# Altium PCB PCB_PDB_V1.PcbDoc
Units mm, origin at the board's own origin, x right, y up, seen from the top; angles counter-clockwise.
Board outline 60 x 60 mm, 4 copper layers (Top Layer, Int1 (GND), Int2 (PWR), Bottom Layer), stack 1.369 mm thick; 79 components, 36 nets, 262 pads, 2 vias.
Unrouted connection lines stored in the file: 133.
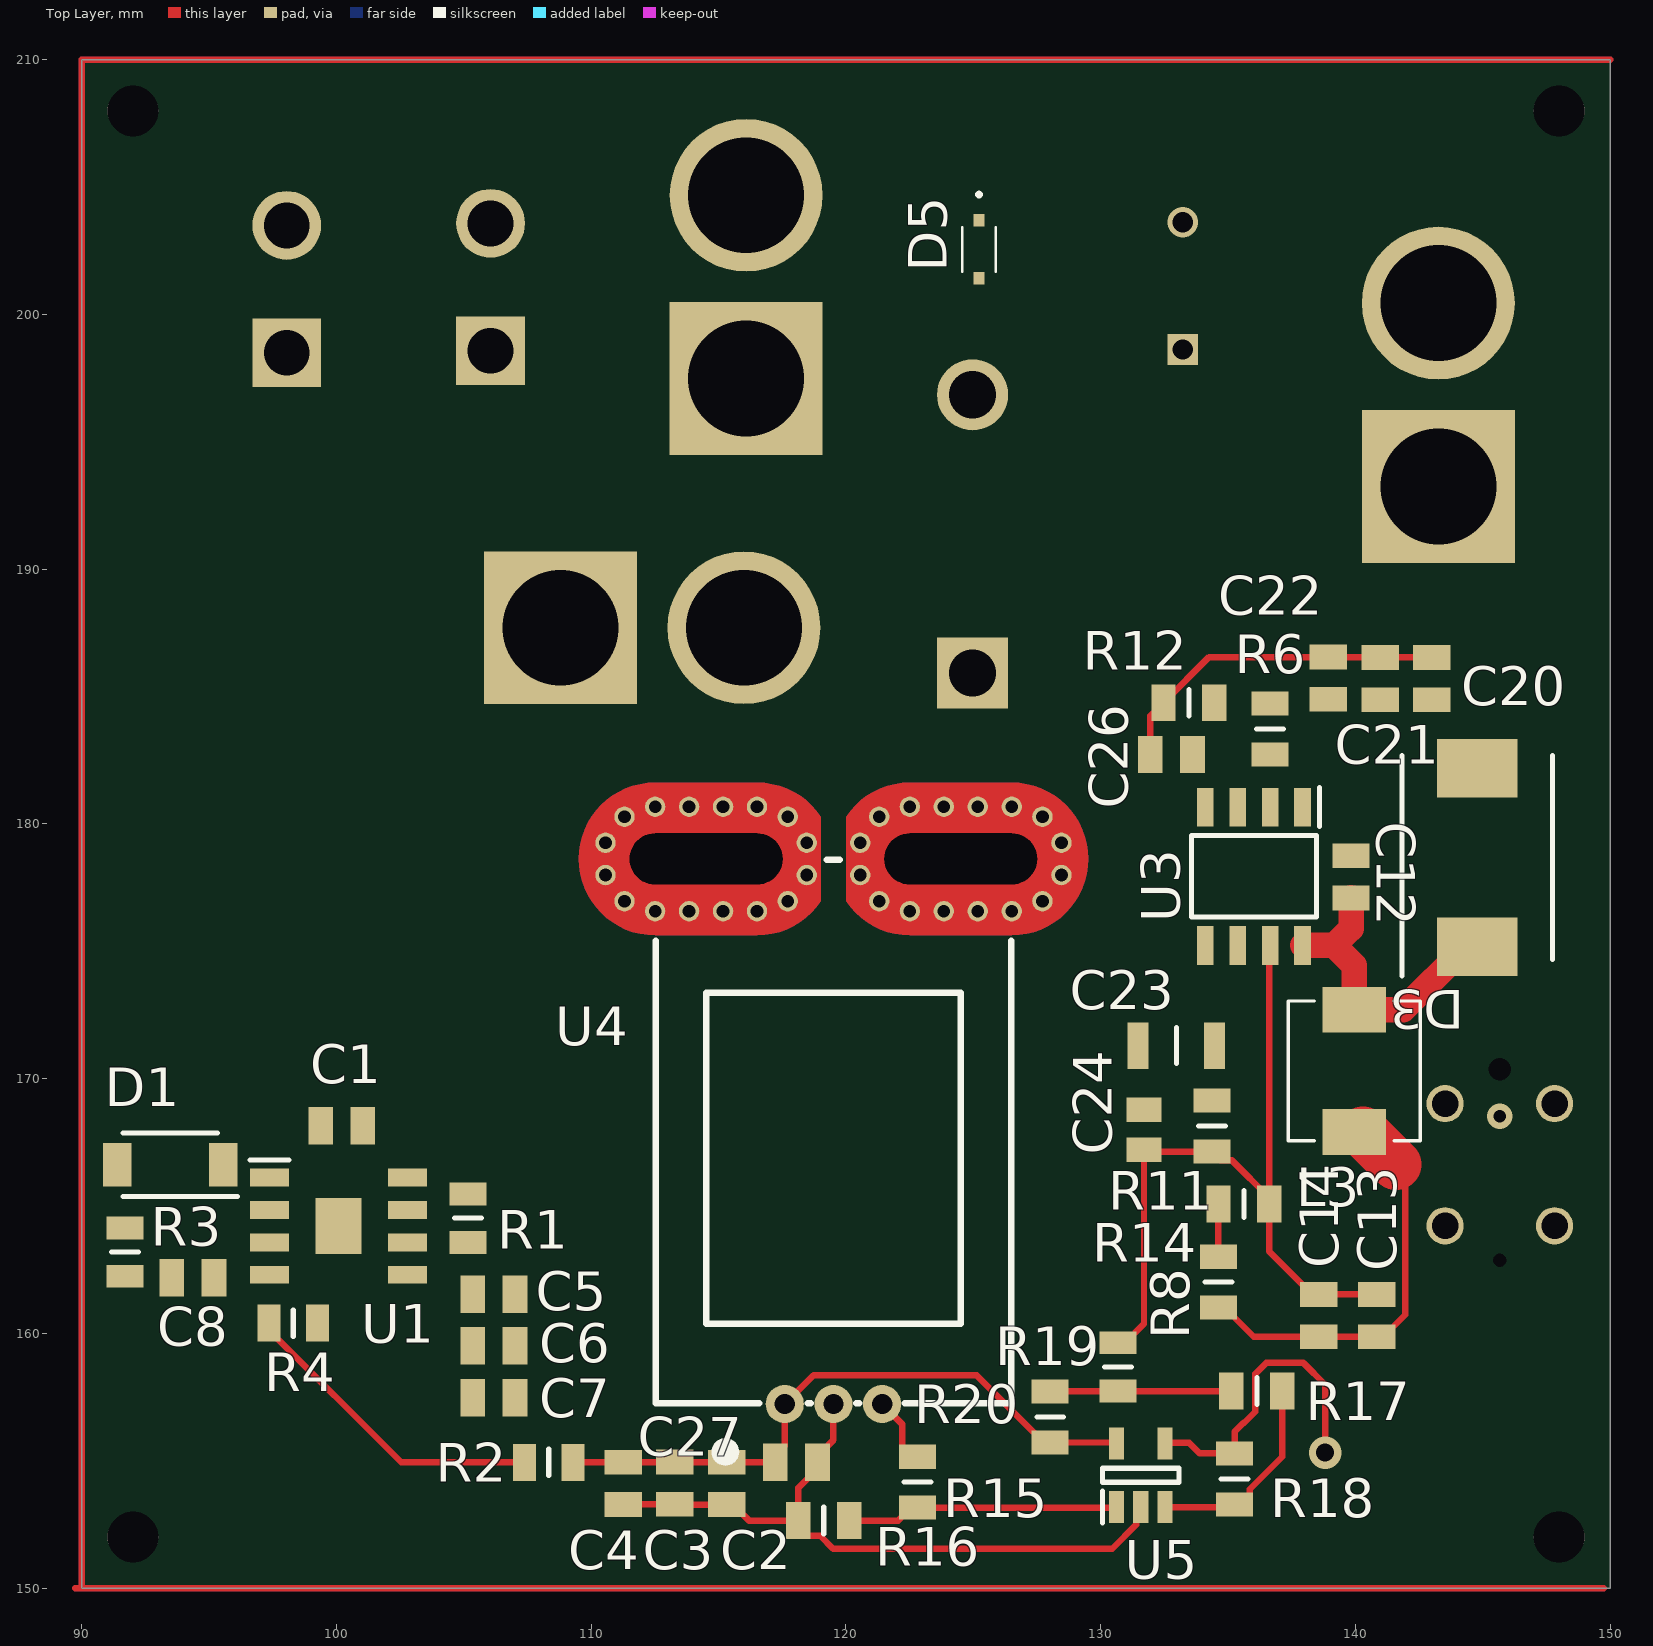
[diagram p0: Top Layer view]
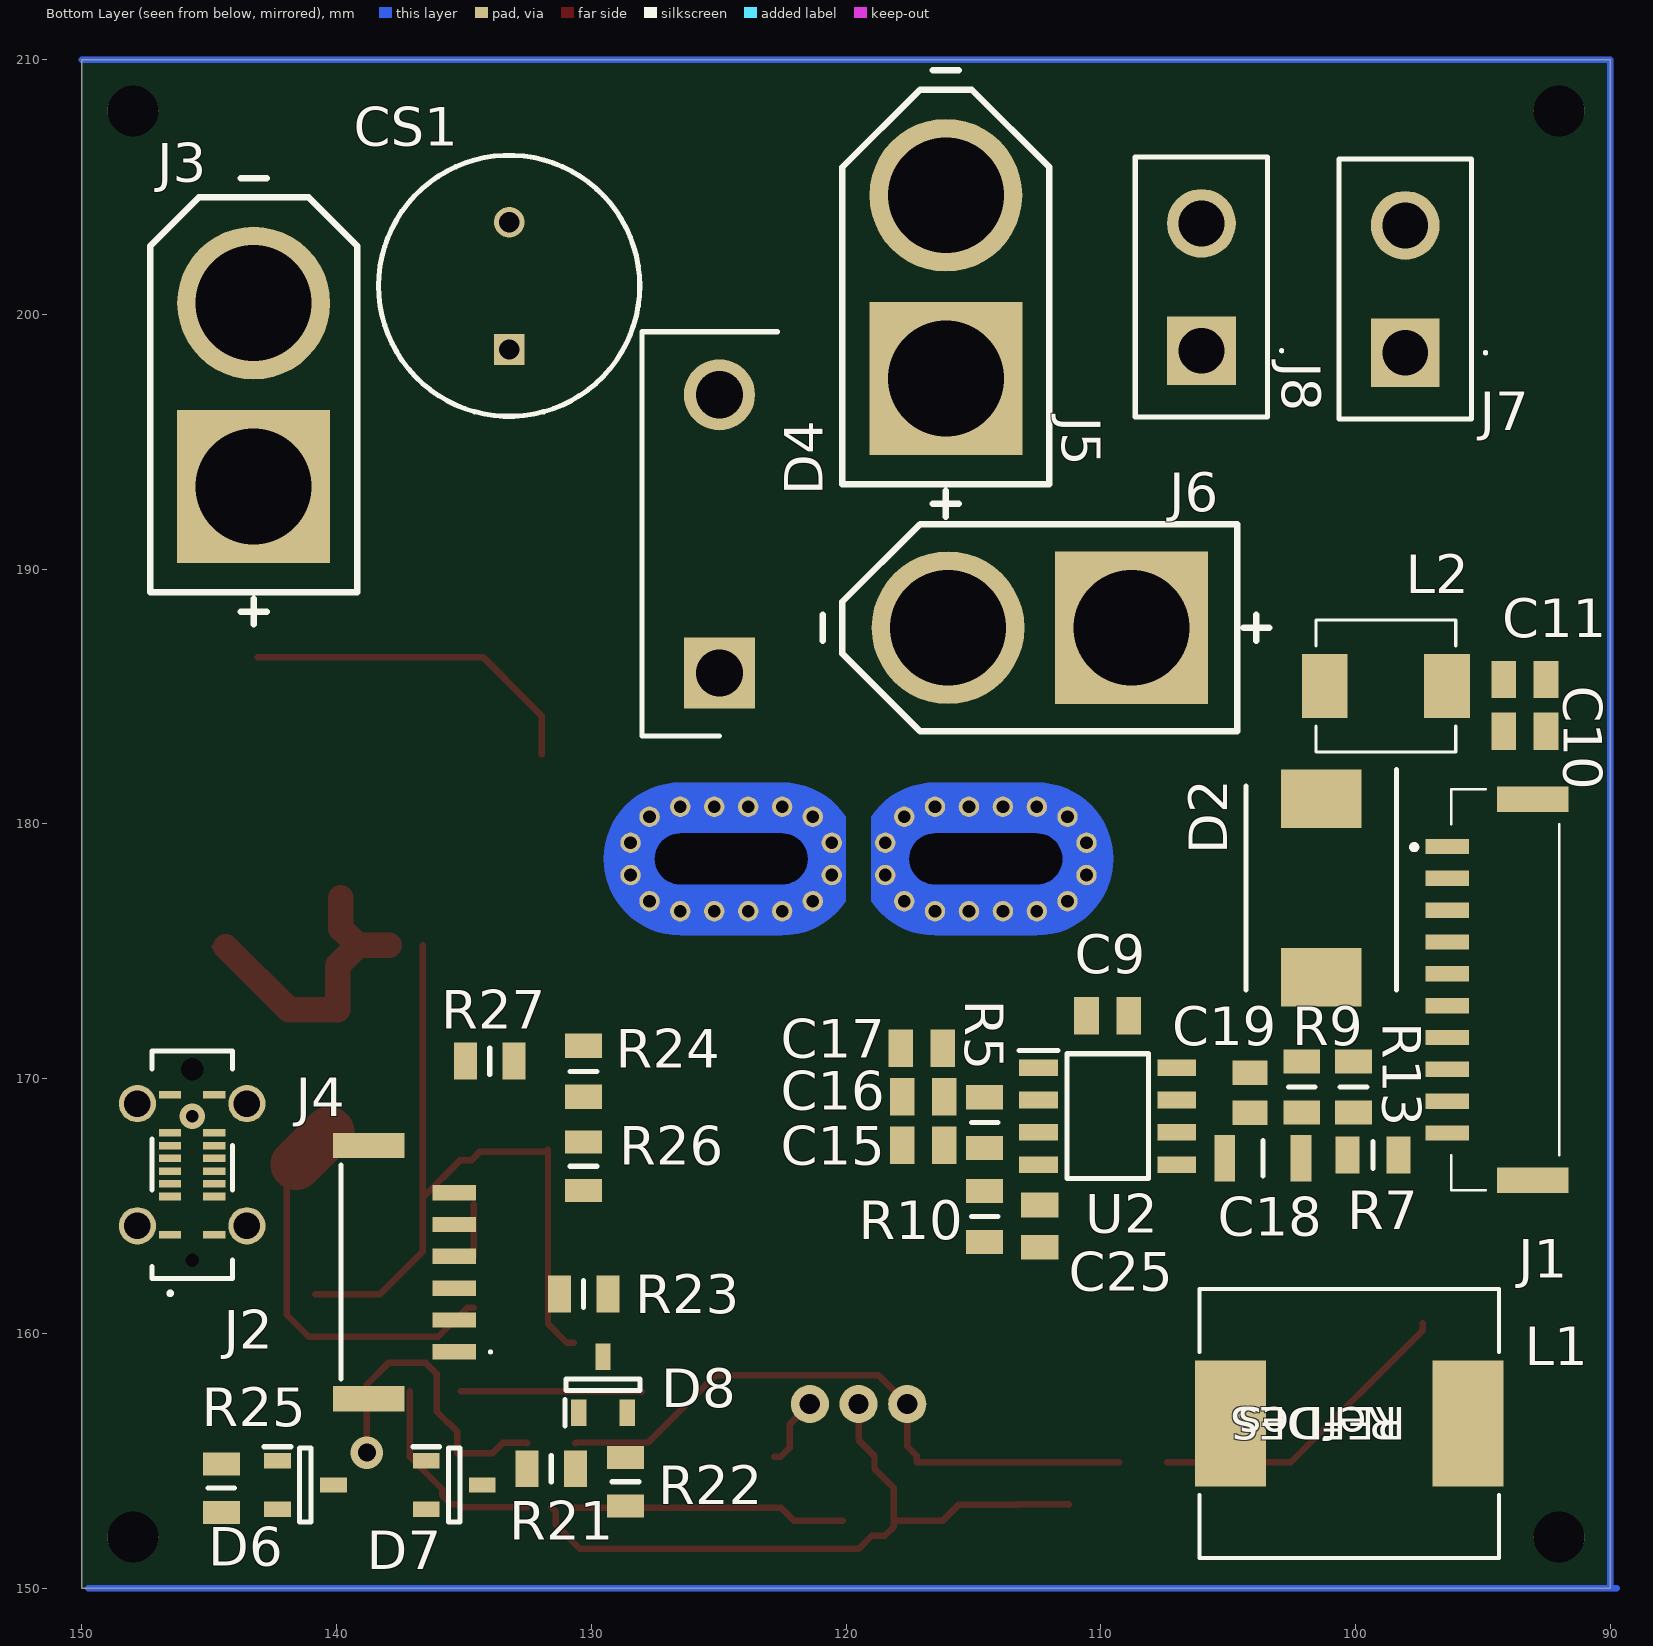
[diagram p1: Bottom Layer view, seen from below]
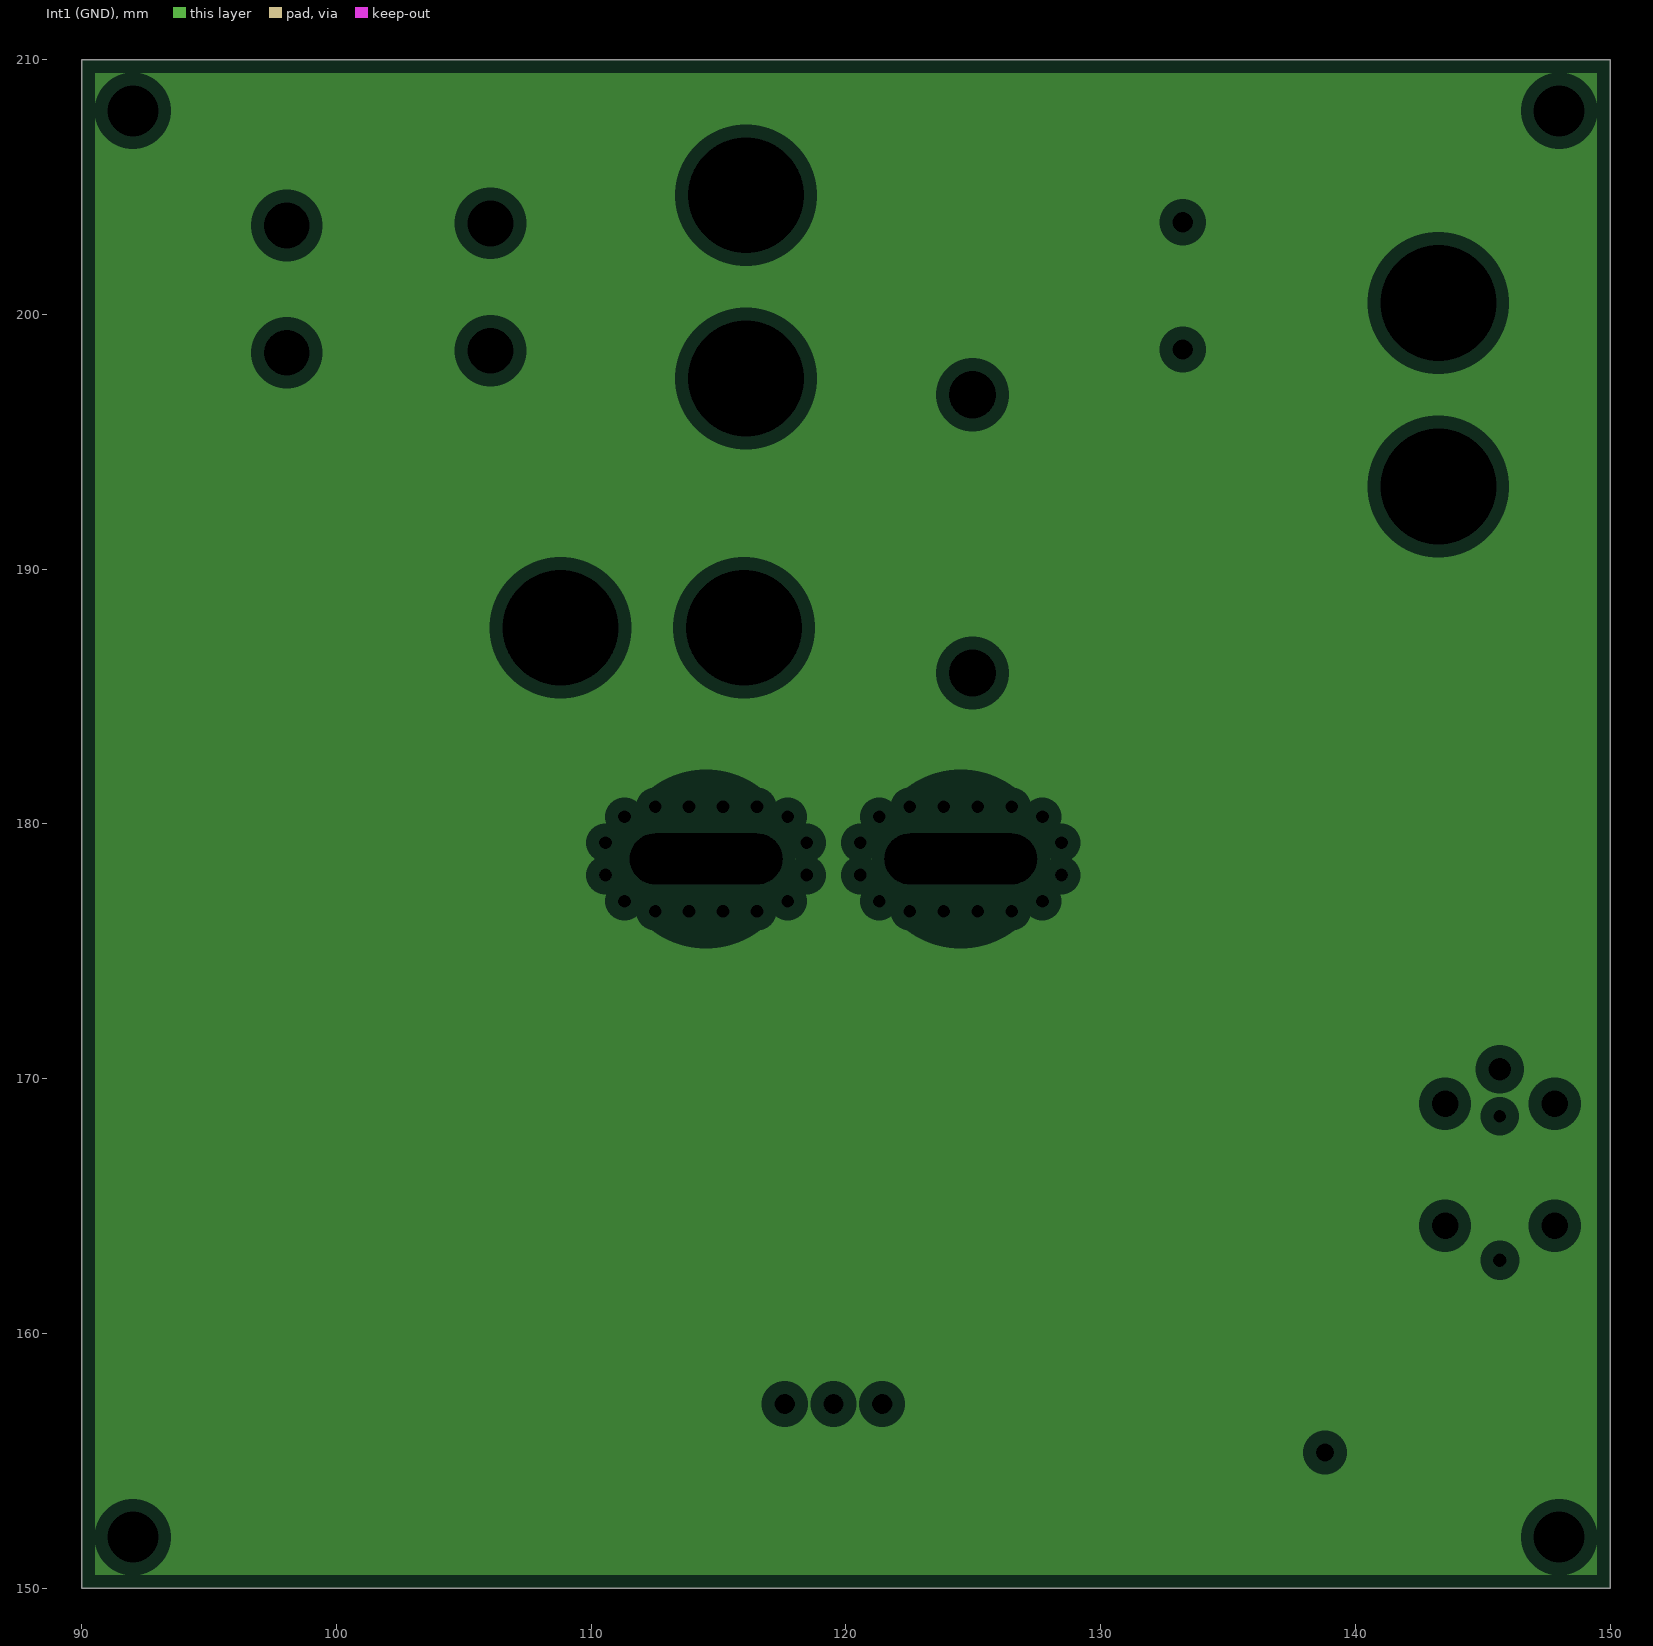
[diagram p2: Int1 (GND), clearances drawn from the general rule]
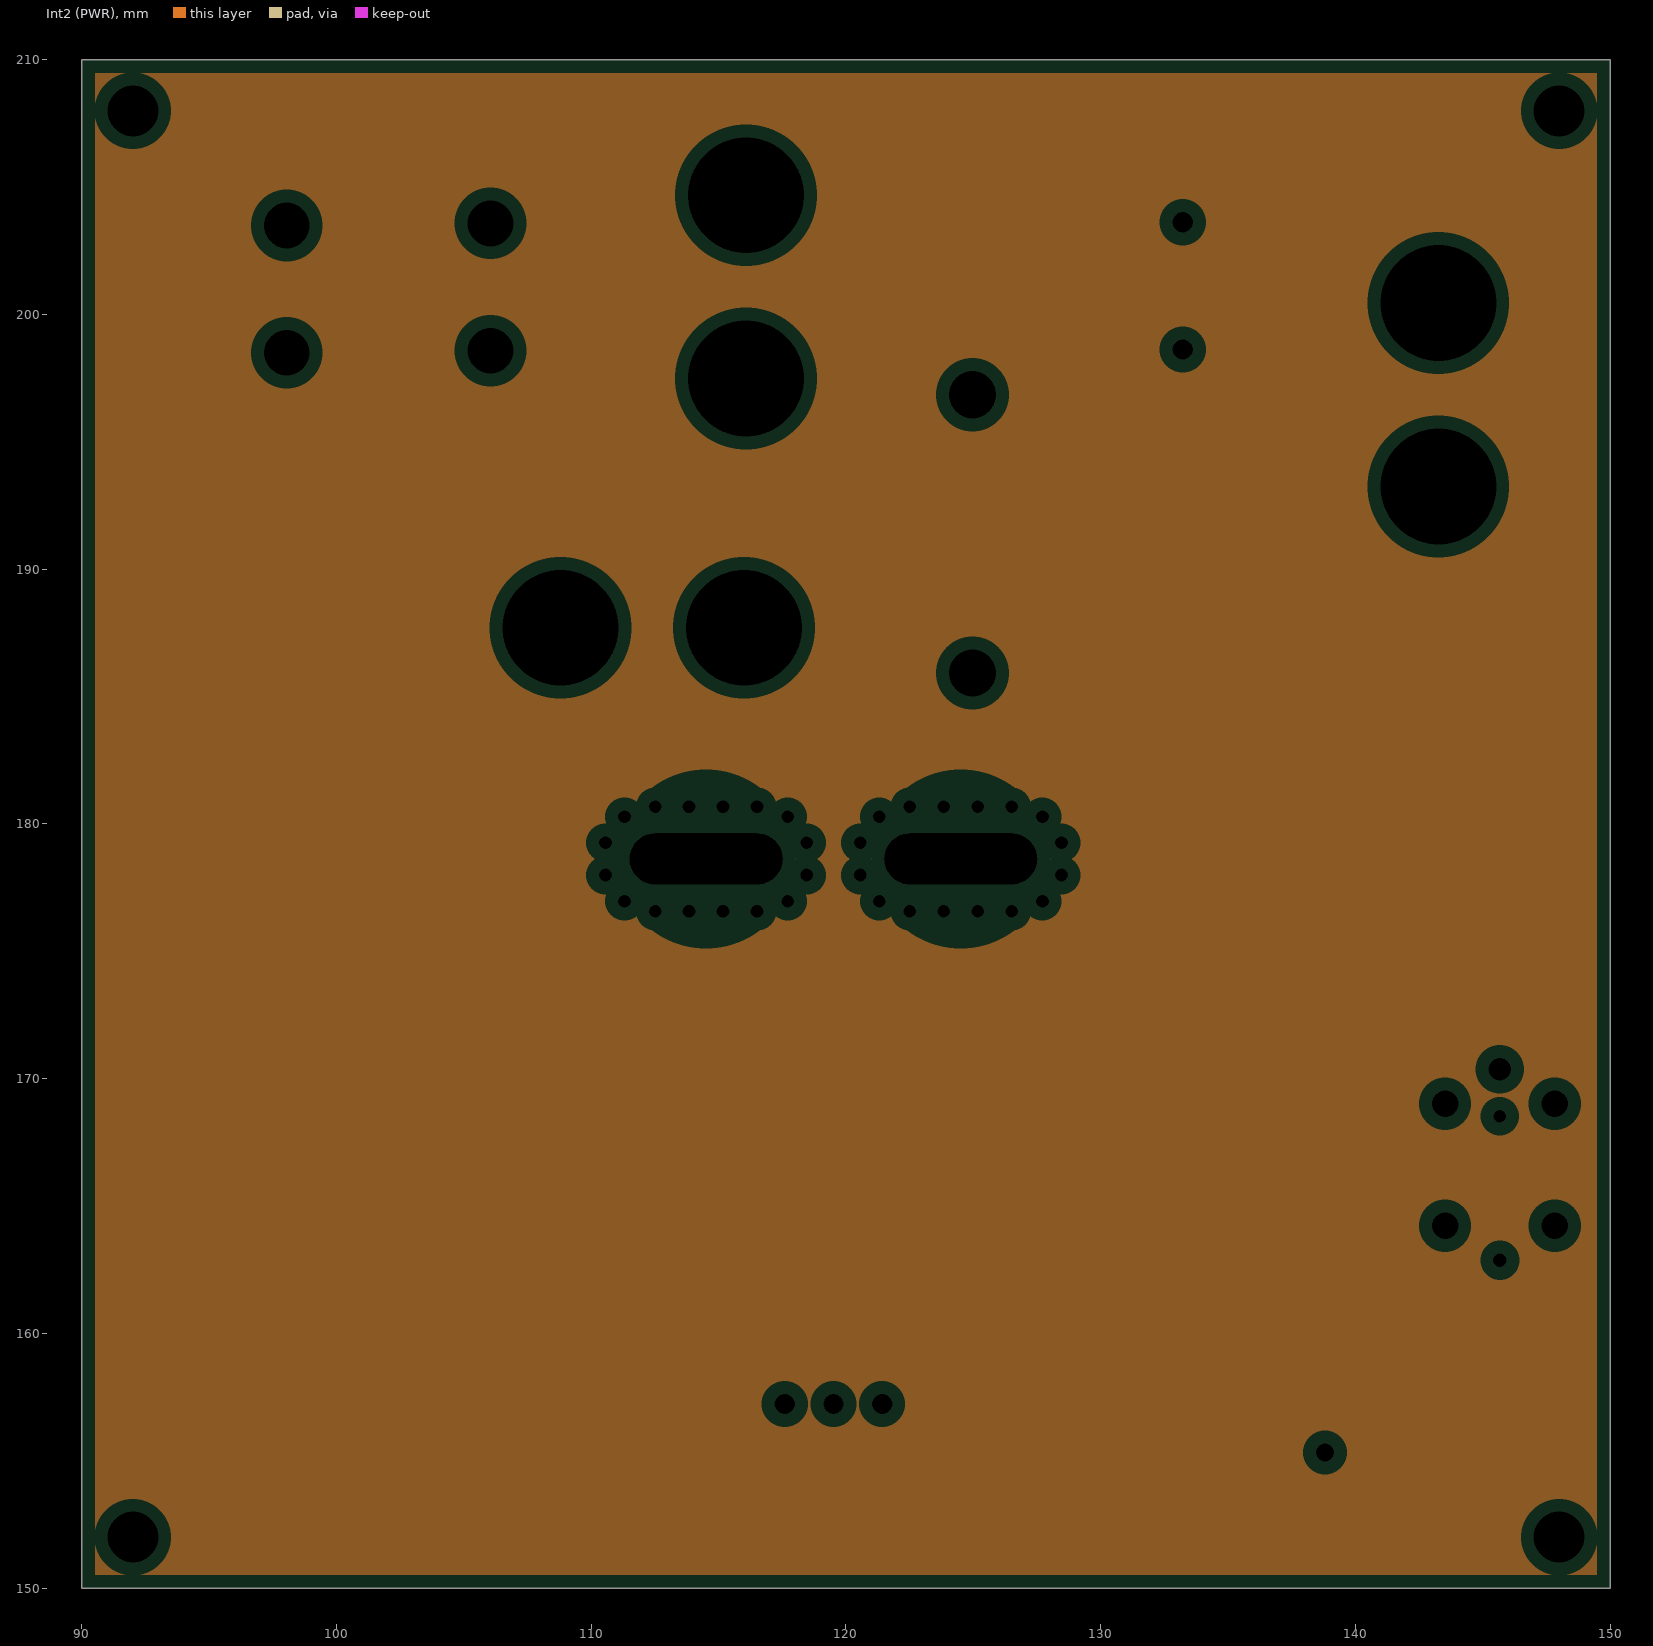
[diagram p3: Int2 (PWR), clearances drawn from the general rule]

## Layer stack, top to bottom
Top Solder: solder mask 0.0254, SM-001, Dk 4
Top Layer: signal copper 0.035
Dielectric 1: prepreg 0.1295, PP-017, Dk 4.3
Dielectric 2: prepreg 0.1295, PP-017, Dk 4.3
Int1 (GND): plane copper 0.035
Dielectric 3: core 0.7112, Core-039, Dk 4.8
Int2 (PWR): plane copper 0.035
Dielectric 4: prepreg 0.1295, PP-017, Dk 4.3
Dielectric 5: prepreg 0.1295, PP-017, Dk 4.3
Bottom Layer: signal copper 0.035
Bottom Solder: solder mask 0.0254, SM-001, Dk 4

## Board outline
90,150 150,150 150,210 90,210

## Design rules (kind name [scope] priority, off if disabled: settings)
Clearance [All] p1: gap=0.254 ignorepadtopadclearanceinfootprint=FALSE
PlaneClearance [All] p1: clearance=0.508
PlaneConnect [All] p1: planeconnectstyle=Relief reliefexpansion=0.508 reliefentries=4 reliefconductorwidth=0.254 reliefairgap=0.254
PolygonConnect [All] p1: connectstyle=Relief reliefconductorwidth=0.254 reliefentries=4 polygonreliefangle="90 Angle" airgapwidth=0.254
RoutingVias [All] p1: holewidth=0.711 width=1.27 viastyle="Through Hole" minholewidth=0.711 minwidth=1.27 maxholewidth=0.711 maxwidth=1.27
SolderMaskExpansion [All] p1: expansion=0.102 istentingtop=FALSE
SupplyNets "Schematic Supply Nets_2" [InNet('GND')] p1: voltage=0.000
SupplyNets "Schematic Supply Nets_1" [InNet('+22.2V BATTERY')] p2: voltage=0.000
SupplyNets "Schematic Supply Nets" [InNet('+5V PIXHAWK')] p3: voltage=0.000
Width [All] p1 off: maxlimit=60 minlimit=0.254 preferedwidth=1 minimp=50.000000 maximp=50.000000 favimp=50.000000
28 further rules are at their usual default settings.

## Classes and differential pairs
component class PowerModul: C1 C2 C3 C4 C5 C6 C7 C8 C9 C12 C17 C22 C25 C26 C27 D1 R1 R2 R3 R4 U1

## Components (designator, comment, footprint, x,y, rotation, side; value= is the part's Value field where it differs from the comment)
C1 "0.1uF" CAPC2012X145N 100.203,168.148 r0 top
C2 "47uF 10V" CAPC2012X145N 115.316,154.11 r90 top
C3 "47uF 10V" CAPC2012X145N 113.284,154.119 r90 top
C4 "47uF 10V" CAPC2012X145N 111.252,154.11 r90 top
C5 "10uF 35V" CAPC2012X145N 106.172,161.544 r0 top
C6 "10uF 35V" CAPC2012X145N 106.172,159.512 r0 top
C7 "0.1uF" CAPC2012X145N 106.172,157.48 r0 top
C8 "10nF" CAPC2012X145N 94.361,162.179 r0 top
C9 "0.1uF" CAPC2012X145N 109.728,172.466 r180 bottom
C10 "47uF 10V" CAPC2012X145N 93.345,183.642 r0 bottom
C11 "47uF 10V" CAPC2012X145N 93.345,185.674 r0 bottom
C12 "0.1uF" CAPC2012X145N 139.827,177.927 r270 top
C13 "47uF 10V" CAPC2012X145N 140.843,160.699 r270 top
C14 "47uF 10V" CAPC2012X145N 138.557,160.699 r270 top
C15 "4.7 uF 50V" CAPC2012X145N 116.967,167.386 r180 bottom
C16 "4.7 uF 50V" CAPC2012X145N 116.967,169.291 r180 bottom
C17 "10nF" CAPC2012X145N 117.026,171.196 r180 bottom
C18 "2200pF" CAPC3216X130N 103.632,166.878 r0 bottom
C19 "22 pF 50 V" CAPC2012X70N 104.14,169.446 r270 bottom
C20 "4.7 uF 50V" CAPC2012X145N 143.002,185.709 r270 top
C21 "4.7 uF 50V" CAPC2012X145N 140.97,185.709 r270 top
C22 "10nF" CAPC2012X145N 138.938,185.725 r270 top
C23 "2200pF" CAPC3216X130N 132.969,171.299 r180 top
C24 "22 pF 50 V" CAPC2012X70N 131.699,167.997 r90 top
C25 "10nF" CAPC2012X145N 112.395,164.211 r90 bottom
C26 "10nF" CAPC2012X145N 132.774,182.729 r0 top
C27 "0.1uF" CAPC2012X145N 118.051,154.94 r180 top
CS1 "1000uF" CAPPRD500W60D1025H2150 133.223,198.628 r90 bottom
D1 "60V" SODFL4725X105N 93.472,166.624 r180 top
D2 "CDBC540-G" DIOM8059X290N 101.346,177.49 r270 bottom
D3 "CDBC540-G" DIOM8059X290N 144.78,178.689 r90 top
D4 "400V 60A" TO1092P531X1558X2499-2P 124.968,185.93 r90 bottom
D5 "SD15C-01FTG" SD15C01FTG 125.222,202.562 r270 top
D6 "BAT54S,215" SOT95P230X110-3N 141.224,154.051 r180 bottom
D7 "BAT54S,215" SOT95P230X110-3N 135.382,154.051 r180 bottom
D8 "TL431MFDT,215" SOT95P230X110-3N 129.54,157.988 r90 bottom
J1 "BM10B-GHS-TBT_LF__SN__N_" BM10BGHSTBTLFSNN 96.393,173.492 r90 bottom
J2 "USB4120-03-C" USB412003C 145.669,166.624 r90 bottom
J3 "XT60PB-M" XT60PB-M 143.256,196.85 r180 bottom
J4 "BM06B-GHS-TBT_LF__SN_" BM06BGHSTBTLFSN 137.607,162.403 r270 bottom
J5 "XT60PB-F" XT60PB-F 116.078,201.085 r180 bottom
J6 "XT60PB-F" XT60PB-F 112.395,187.706 r90 bottom
J7 "XT30UPB-F" XT30UPBF 98.044,198.501 r180 bottom
J8 "XT30UPB-F" XT30UPBF 106.045,198.581 r180 bottom
L1 "22 uH" IND_104CDMCCDS_SUM 100.244,156.464 r0 bottom
L2 "4.7uH" IND_ECS-MPIL0530-4R7MC 98.806,185.42 r180 bottom
L3 "4.7uH" IND_ECS-MPIL0530-4R7MC 139.954,170.307 r270 top
R1 "10k" RESC2012X60N 105.156,164.526 r90 top
R2 "160k" RESC2012X60N 108.331,154.94 r0 top
R3 "4.7k" RESC2012X60N 91.694,163.195 r270 top
R4 "30k" RESC2012X60N 98.298,160.401 r180 top
R5 "665k" RESC2012X50N 114.554,168.275 r90 bottom
R6 "665k" RESC2012X50N 136.652,183.729 r270 top
R7 "10.2k" RESC2012X50N 99.314,167.005 r180 bottom
R8 "10.2k" RESC2012X50N 134.62,162.012 r270 top
R9 "37.4k" RESC2012X50N 102.108,169.672 r270 bottom
R10 "130k" RESC2012X50N 114.554,164.592 r90 bottom
R11 "37.4k" RESC2012X50N 134.366,168.14 r90 top
R12 "130k" RESC2012X50N 133.461,184.761 r0 top
R13 "1.96k" RESC2012X50N 100.076,169.672 r270 bottom
R14 "1.96k" RESC2012X50N 135.62,165.076 r180 top
R15 "20k" RESC2012X50N 122.809,154.162 r90 top
R16 "20k" RESC2012X50N 119.126,152.654 r0 top
R17 "20k" RESC2012X50N 136.128,157.734 r0 top
R18 "20k" RESC2012X50N 135.255,154.289 r270 top
R19 "2k" RESC2012X60N 130.683,158.684 r270 top
R20 "18k" RESC2012X50N 128.016,156.718 r270 top
R21 "806" RESC2012X60N 131.572,154.686 r180 bottom
R22 "750" RESC2012X60N 128.651,154.178 r270 bottom
R23 "2.49k" RESC2012X60N 130.302,161.544 r0 bottom
R24 "20k" RESC2012X50N 130.302,170.291 r270 bottom
R25 "100" RESC2012X60N 144.526,153.924 r90 bottom
R26 "1.6K" RESC2012X60N 130.302,166.563 r90 bottom
R27 "100" RESC2012X60N 133.985,170.688 r0 bottom
U1 "BD9G401EFJ-ME2" SOIC127P600X100-9N 100.076,164.211 r0 top
U2 "TPS54531DDAR" SOIC127P600X175-8N 109.728,168.529 r180 bottom
U3 "TPS54531DDAR" SOIC127P600X175-8N 136.017,177.948 r270 top
U4 "Current sensor" ACS770xCB-PFF 119.507,166.878 r0 top
U5 "LM321SN3T1G" SOT95P275X110-5N 131.572,154.432 r90 top

## Footprints (in the part's own frame and the unit in brackets; to place one, negate y for a bottom-side part, rotate by r counter-clockwise, add the part's x,y. Pads: shape width x height; smd on the part's side, far side on the other; paste and mask are expansions set on the pad)
ACS770xCB-PFF [mm] "Current sensor"
  round 1.5 hole 0.8: 1(-1.91,-9.65) 2(0,-9.65) 3(1.91,-9.65)
  round 1.524 hole 2 slot 6 at 0 deg: 4(5,11.75) 5(-5,11.75)
  round 0.025 smd: 4(5.25,11.75) 5(-5.25,11.75)
  round 0.025 smd far side: 4(5.25,11.75) 5(-5.25,11.75)
  round 0.8 hole 0.5: NC(-8.95,11.117) NC(-8.95,12.383) NC(-8.205,10.092) NC(-8.205,13.408) NC(-7,9.7) NC(-7,13.8) NC(-5.667,9.7) NC(-5.667,13.8) NC(-4.333,9.7) NC(-4.333,13.8) NC(-3,9.7) NC(-3,13.8) NC(-1.795,13.408) NC(-1.795,10.092) NC(-1.05,12.383) NC(-1.05,11.117) NC(1.05,11.117) NC(1.05,12.383) NC(1.795,10.092) NC(1.795,13.408) NC(3,9.7) NC(3,13.8) NC(4.333,9.7) NC(4.333,13.8) NC(5.667,9.7) NC(5.667,13.8) NC(7,9.7) NC(7,13.8) NC(8.205,13.408) NC(8.205,10.092) NC(8.95,12.383) NC(8.95,11.117)
  Top Layer region: 7,14.75 3,14.75 1.581,14.393 0.5,13.408 0.5,13.408 0.5,10.092 1.581,9.107 3,8.75 3,8.75 7,8.75 8.302,9.047 9.345,9.88 9.925,11.082 9.925,12.418 9.345,13.62 8.302,14.453 7,14.75
  Top Layer region: -7,8.75 -3,8.75 -1.581,9.107 -0.5,10.092 -0.5,10.092 -0.5,13.408 -1.581,14.393 -3,14.75 -3,14.75 -7,14.75 -8.302,14.453 -9.345,13.62 -9.925,12.418 -9.925,11.082 -9.345,9.88 -8.302,9.047 -7,8.75
  Bottom Layer region: 7,14.75 3,14.75 1.581,14.393 0.5,13.408 0.5,13.408 0.5,10.092 1.581,9.107 3,8.75 3,8.75 7,8.75 8.302,9.047 9.345,9.88 9.925,11.082 9.925,12.418 9.345,13.62 8.302,14.453 7,14.75
  Bottom Layer region: -7,8.75 -3,8.75 -1.581,9.107 -0.5,10.092 -0.5,10.092 -0.5,13.408 -1.581,14.393 -3,14.75 -3,14.75 -7,14.75 -8.302,14.453 -9.345,13.62 -9.925,12.418 -9.925,11.082 -9.345,9.88 -8.302,9.047 -7,8.75
  silkscreen extent -6.98,-12.06 6.98,11.72, body extent -7,-10.1 7,12.5, height 8
BM06BGHSTBTLFSN [mm]
  rect 0.6x1.7 smd: 1(3.125,2.225) 2(1.875,2.225) 3(0.625,2.225) 4(-0.625,2.225) 5(-1.875,2.225) 6(-3.125,2.225)
  rect 1x2.8 smd: MP1(4.975,-1.125) MP2(-4.975,-1.125)
  silkscreen extent -4.2,-2.22 4.2,3.7, body extent -5.37,-2.24 5.38,2.71, height 4.21
BM10BGHSTBTLFSNN [mm]
  rect 0.6x1.7 smd: 1(5.625,0) 2(4.375,0) 3(3.125,0) 4(1.875,0) 5(0.625,0) 6(-0.625,0) 7(-1.875,0) 8(-3.125,0) 9(-4.375,0) 10(-5.625,0)
  rect 1x2.8 smd: MP1(-7.475,-3.35) MP2(7.475,-3.35)
  silkscreen extent -7.88,-4.4 7.88,1.4, body extent -7.88,-4.54 7.88,0.41, height 4.05
CAPC2012X70N [mm]
  rect 0.96x1.39 smd: 1(-0.79,0) 2(0.79,0)
  body extent -1,-0.63 1,0.63, height 0.7
CAPC2012X145N [mm]
  rect 0.97x1.47 smd: 1(-0.83,0) 2(0.83,0)
  body extent -1,-0.63 1,0.63, height 1.45
CAPC3216X130N [mm]
  rect 0.82x1.82 smd: 1(-1.5,0) 2(1.5,0)
  silkscreen extent 0,-0.7 0,0.7, body extent -1.6,-0.8 1.6,0.8, height 1.3
CAPPRD500W60D1025H2150 [mm]
  rect 1.2x1.2 hole 0.8: 1(0,0)
  round 1.2 hole 0.8: 2(5,0)
  silkscreen extent -2.62,-5.13 7.62,5.13, body extent -2.75,-5.24 7.75,5.24, height 21.5
DIOM8059X290N [mm]
  rect 2.3x3.15 smd: 1(-3.5,0) 2(3.5,0)
  silkscreen extent -4.65,-2.95 4,2.95, body extent -4,-2.95 4,2.95, height 2.9
IND_104CDMCCDS_SUM [mm]
  rect 2.789x4.954 smd paste+0 mask+0: 1(-4.658,0) 2(4.658,0)
  silkscreen extent -5.88,-5.28 5.88,5.28, body extent -5.75,-5.16 5.75,5.16, height 3.99
IND_ECS-MPIL0530-4R7MC [mm]
  rect 1.8x2.5 smd: 1(-2.4,0) 2(2.4,0)
  silkscreen extent -2.75,-2.59 2.75,2.59, body extent -2.75,-2.59 2.75,2.59, height 3
RESC2012X50N [mm]
  rect 0.95x1.45 smd: 1(-1,0) 2(1,0)
  silkscreen extent 0,-0.53 0,0.53, body extent -1.02,-0.63 1.02,0.63, height 0.5
RESC2012X60N [mm]
  rect 0.9x1.45 smd: 1(-0.95,0) 2(0.95,0)
  silkscreen extent 0,-0.53 0,0.53, body extent -1,-0.63 1,0.63, height 0.6
SD15C01FTG [mm]
  rect 0.49x0.45 smd: 1(-1.14,0) 2(1.14,0)
  silkscreen extent -2.2,-0.65 0.87,0.65, body extent -1.31,-0.65 1.31,0.65, height 1
SODFL4725X105N [mm]
  rect 1.12x1.72 smd: 1(-2.075,0) 2(2.075,0)
  silkscreen extent -2.64,-1.25 1.85,1.25, body extent -2.35,-1.25 2.35,1.25, height 0.95
SOIC127P600X100-9N [mm]
  rect 1.525x0.7 smd: 1(-2.712,1.905) 2(-2.712,0.635) 3(-2.712,-0.635) 4(-2.712,-1.905) 5(2.712,-1.905) 6(2.712,-0.635) 7(2.712,0.635) 8(2.712,1.905)
  rect 1.8x2.2 smd: 9(0,0)
  silkscreen extent -3.47,2.61 -1.95,2.61, body extent -3,-2.45 3,2.45, height 1
SOIC127P600X175-8N [mm]
  rect 1.525x0.65 smd: 1(-2.712,1.905) 2(-2.712,0.635) 3(-2.712,-0.635) 4(-2.712,-1.905) 5(2.712,-1.905) 6(2.712,-0.635) 7(2.712,0.635) 8(2.712,1.905)
  silkscreen extent -3.47,-2.45 1.6,2.58, body extent -3,-2.45 3,2.45, height 1.75
SOT95P230X110-3N [mm]
  rect 1.05x0.6 smd: 1(-1.1,0.95) 2(-1.1,-0.95) 3(1.1,0)
  silkscreen extent -1.63,-1.45 0.23,1.5, body extent -1.2,-1.45 1.2,1.45, height 0.95
SOT95P275X110-5N [mm]
  rect 1.25x0.6 smd: 1(-1.25,0.95) 2(-1.25,0) 3(-1.25,-0.95) 4(1.25,-0.95) 5(1.25,0.95)
  silkscreen extent -1.88,-1.5 0.28,1.5, body extent -1.38,-1.5 1.38,1.5, height 1.1
TO1092P531X1558X2499-2P [mm]
  rect 2.79x2.79 hole 1.86: 1(0,0)
  round 2.79 hole 1.86: 2(10.92,0)
  silkscreen extent -2.47,-2.27 13.39,3.04, body extent -2.39,-2.21 13.31,2.81, height 25.05
USB412003C [mm]
  rect 0.3x0.87 smd: A1(-2.75,0.865) A4(-1.25,0.865) A5(-0.75,0.865) A6(-0.25,0.865) A7(0.25,0.865) A8(0.75,0.865) A9(1.25,0.865) A12(2.75,0.865) B1(2.75,-0.865) B4(1.25,-0.865) B5(0.75,-0.865) B6(0.25,-0.865) B7(-0.25,-0.865) B8(-0.75,-0.865) B9(-1.25,-0.865) B12(-2.75,-0.865)
  round 1.46 hole 1.04: MH1(-2.4,2.15) MH2(2.4,2.15) MH3(2.4,-2.15) MH4(-2.4,-2.15)
  round 0.26 hole 0.52 unplated: MH5(-3.75,0)
  round 0.445 hole 0.89 unplated: MH6(3.75,0)
  silkscreen extent -5.1,-1.58 4.47,1.58, body extent -4.47,-2.3 4.47,2.3, height 6.5
XT30UPBF [mm]
  rect 2.7x2.7 hole 1.8: 1(0,0)
  round 2.7 hole 1.8: 2(0,5)
  silkscreen extent -2.6,-2.6 3.2,7.6, body extent -2.81,-2.6 2.81,7.6, height 9.41
XT60PB-F [mm] "Connector"
  round 6 hole 4.55: N(0,3.6)
  rect 6x6 / inner round 6 / far side rect 6x6 hole 4.55: P(0,-3.6)
  silkscreen extent -4.06,-9.02 4.06,8.51, body extent -3.9,-7.8 4,7.7, height 16.69
XT60PB-M [mm] "Connector"
  round 6 hole 4.55: N(0,3.6)
  rect 6x6 / inner round 6 / far side rect 6x6 hole 4.55: P(0,-3.6)
  silkscreen extent -4.06,-9.02 4.06,8.51, body extent -4,-7.7 4,7.7, height 15.9

## Part data
C1 C7 C9 C12 C27: library part C2012X7R2A104K125AA, "Capacitor", Manufacturer_Name=TDK, Mouser Part Number=810-C2012X7R2A104K, Arrow Part Number=C2012X7R2A104K125AA, Arrow Price/Stock=https://www.arrow.com/en/products/c2012x7r2a104k125aa/tdk?region=europe, ClassName=PowerModul, Datasheet Link=https://product.tdk.com/info/en/catalog/datasheets/mlcc_commercial_midvoltage_en.pdf, Height=1.45mm, Manufacturer_Part_Number=C2012X7R2A104K125AA, Mouser Price/Stock=https://www.mouser.co.uk/ProductDetail/TDK/C2012X7R2A104K125AA?qs=NRhsANhppD9J0ZsT2%2Fo%2F7Q%3D%3D
C2 C3 C4 C10 C11 C13 C14: library part C2012X5R1A476M125AC, "Capacitor", Manufacturer_Name=TDK, Mouser Part Number=810-C2012X5R1A476M, Arrow Part Number=C2012X5R1A476M125AC, Arrow Price/Stock=https://www.arrow.com/en/products/c2012x5r1a476m125ac/tdk?region=nac, ClassName=PowerModul, Datasheet Link=https://product.tdk.com/info/en/catalog/datasheets/mlcc_commercial_midvoltage_en.pdf, Height=1.45mm, Manufacturer_Part_Number=C2012X5R1A476M125AC, Mouser Price/Stock=https://www.mouser.co.uk/ProductDetail/TDK/C2012X5R1A476M125AC?qs=LcTL%2F5vFEzGyFw5hxP%2FMXw%3D%3D
C5 C6: library part C2012X5R1V106K125AC, "Capacitor", Manufacturer_Name=TDK, Mouser Part Number=810-C2012X5R1V106K1C, Arrow Part Number=C2012X5R1V106K125AC, Arrow Price/Stock=https://www.arrow.com/en/products/c2012x5r1v106k125ac/tdk?region=europe, ClassName=PowerModul, Datasheet Link=https://product.tdk.com/info/en/catalog/datasheets/mlcc_commercial_midvoltage_en.pdf, Height=1.45mm, Manufacturer_Part_Number=C2012X5R1V106K125AC, Mouser Price/Stock=https://www.mouser.co.uk/ProductDetail/TDK/C2012X5R1V106K125AC?qs=6JAMGB%252BEdkwcwonKbQLeCg%3D%3D
C8 C17 C22 C25 C26: library part C2012X7R2E103K125AA, "Capacitor", Manufacturer_Name=TDK, Mouser Part Number=810-C2012X7R2E103K, Arrow Part Number=C2012X7R2E103K125AA, Arrow Price/Stock=https://www.arrow.com/en/products/c2012x7r2e103k125aa/tdk?region=nac, ClassName=PowerModul, Datasheet Link=https://product.tdk.com/info/en/catalog/datasheets/mlcc_commercial_midvoltage_en.pdf, Height=1.45mm, Manufacturer_Part_Number=C2012X7R2E103K125AA, Mouser Price/Stock=https://www.mouser.co.uk/ProductDetail/TDK/C2012X7R2E103K125AA?qs=NRhsANhppD%2FvPjIeAxskbg%3D%3D
C15 C16 C20 C21: library part GRM21BR61H475KE51L, "Capacitor", Manufacturer_Name="Murata Electronics", Mouser Part Number=81-GRM21BR61H475KE1L, Arrow Part Number=GRM21BR61H475KE51L, Arrow Price/Stock=https://www.arrow.com/en/products/grm21br61h475ke51l/murata-manufacturing?region=nac, Datasheet Link=https://search.murata.co.jp/Ceramy/image/img/A01X/G101/ENG/GRM21BR61H475KE51-01A.pdf, Height=1.45mm, Manufacturer_Part_Number=GRM21BR61H475KE51L, Mouser Price/Stock=https://www.mouser.co.uk/ProductDetail/Murata-Electronics/GRM21BR61H475KE51L?qs=eeBpzGFlv%252B%252BOtLzDC1PY6Q%3D%3D
C18 C23: library part CGA5H4C0G2J222J115AA, "Capacitor 2200pF 630V", Manufacturer_Name=TDK, Datasheet Link=http://docs-europe.electrocomponents.com/webdocs/14e9/0900766b814e9125.pdf, Height=1.3mm, Manufacturer_Part_Number=CGA5H4C0G2J222J115AA
C19 C24: library part CC0805JRNPO9BN220, "Capacitor", Manufacturer_Name=YAGEO, Mouser Part Number=603-CC805JRNPO9BN220, Datasheet Link=https://componentsearchengine.com/Datasheets/2/CC0805JRNPO9BN220.pdf, Height=0.7mm, Manufacturer_Part_Number=CC0805JRNPO9BN220, Mouser Price/Stock=https://www.mouser.co.uk/ProductDetail/YAGEO/CC0805JRNPO9BN220?qs=vTakOoo5QyK71b5vkghGmg%3D%3D
CS1: library part 35PX1000MEFC10X20, "Capacitor Polarised", Manufacturer_Name=Rubycon, Mouser Part Number=232-35PX1000MEFC10X2, Arrow Part Number=35PX1000MEFC10X20, Arrow Price/Stock=https://www.arrow.com/en/products/35px1000mefc10x20/rubycon?region=nac, Datasheet Link=https://www.rubycon.co.jp/wp-content/uploads/catalog-aluminum/PX.pdf, Height=21.5mm, Manufacturer_Part_Number=35PX1000MEFC10X20, Mouser Price/Stock=https://www.mouser.co.uk/ProductDetail/Rubycon/35PX1000MEFC10X20?qs=T3oQrply3y86%2F1qnNfO%252BAA%3D%3D
D1: library part RBR5LAM60ATFTR, "Schottky Diode", Manufacturer_Name="ROHM Semiconductor", Mouser Part Number=755-RBR5LAM60ATFTR, ClassName=PowerModul, Datasheet Link=https://fscdn.rohm.com/en/products/databook/datasheet/discrete/diode/schottky_barrier/rbr5lam60atftr-e.pdf, Height=1.05mm, Manufacturer_Part_Number=RBR5LAM60ATFTR, Mouser Price/Stock=https://www.mouser.co.uk/ProductDetail/ROHM-Semiconductor/RBR5LAM60ATFTR?qs=4v%252BiZTmLVHGKJkO8tMW4zA%3D%3D
D2 D3: "Diode", Manufacturer_Name="Comchip Technology", Mouser Part Number=750-CDBC540-G, Arrow Part Number=CDBC540-G, Arrow Price/Stock=https://www.arrow.com/en/products/cdbc540-g/comchip-technology?utm_currency=USD&region=nac, Datasheet Link=https://eu.mouser.com/datasheet/2/80/CDBC520-HF_Thru195340._CDBC5100-HF_RevB-1480991.pdf, Height=2.9mm, Manufacturer_Part_Number=CDBC540-G, Mouser Price/Stock=https://www.mouser.co.uk/ProductDetail/Comchip-Technology/CDBC540-G?qs=tw%252BuQ%2FB6PO2ExpPYY64Vzw%3D%3D
D4: library part VS-60EPU04-N3, "Diode", Manufacturer_Name=Vishay, Datasheet Link=https://www.vishay.com/docs/94022/vs-60epu04-n3.pdf, Height=5.31mm, Manufacturer_Part_Number=VS-60EPU04-N3
D5: "TVS Diode (Bi-directional)", Manufacturer_Name=LITTELFUSE, Mouser Part Number=576-SD15C-01FTG, Arrow Part Number=SD15C-01FTG, Arrow Price/Stock=https://www.arrow.com/en/products/sd15c-01ftg/littelfuse?region=nac, Datasheet Link=https://www.arrow.com/en/products/sd15c-01ftg/littelfuse, Height=1.14mm, Manufacturer_Part_Number=SD15C-01FTG, Mouser Price/Stock=https://www.mouser.co.uk/ProductDetail/Littelfuse/SD15C-01FTG?qs=4zl93aaztU8pjSvpxpJP6g%3D%3D
D6 D7: "Schottky Diode", Manufacturer_Name=Nexperia, Mouser Part Number=771-BAT54S-T/R, Arrow Part Number=BAT54S,215, Arrow Price/Stock=https://www.arrow.com/en/products/bat54s215/nexperia?utm_currency=USD&region=europe, Datasheet Link=https://assets.nexperia.com/documents/data-sheet/BAT54S.pdf, Height=1.1mm, Manufacturer_Part_Number=BAT54S,215, Mouser Price/Stock=https://www.mouser.co.uk/ProductDetail/Nexperia/BAT54S215?qs=me8TqzrmIYVOaf3j7zH0Wg%3D%3D
D8: "Integrated Circuit", Manufacturer_Name=Nexperia, Mouser Part Number=771-TL431MFDT215, Arrow Part Number=TL431MFDT,215, Arrow Price/Stock=https://www.arrow.com/en/products/tl431mfdt215/nexperia?utm_currency=USD&region=nac, Datasheet Link=https://assets.nexperia.com/documents/data-sheet/TL431_FAM.pdf, Height=1.1mm, Manufacturer_Part_Number=TL431MFDT,215, Mouser Price/Stock=https://www.mouser.co.uk/ProductDetail/Nexperia/TL431MFDT215?qs=A1cBxND5mHKvFzVl3lBdcQ%3D%3D
J1: "Connector", Arrow Part Number=BM10B-GHS-TBT(LF)(SN)(N), Manufacturer_Name="JST (JAPAN SOLDERLESS TERMINALS)", Arrow Price/Stock=https://www.arrow.com/en/products/bm10b-ghs-tbt-lf-sn-n/jst-manufacturing?utm_currency=USD&region=europe, Datasheet Link=http://www.jst-mfg.com/product/pdf/eng/eGH.pdf, Height=4.05mm, Manufacturer_Part_Number=BM10B-GHS-TBT(LF)(SN)(N)
J2: "Connector", Manufacturer_Name="GCT (GLOBAL CONNECTOR TECHNOLOGY)", Mouser Part Number=640-USB4120-03-C, Datasheet Link=https://gct.co/connector/usb4120, Height=6.75mm, Manufacturer_Part_Number=USB4120-03-C, Mouser Price/Stock=https://www.mouser.co.uk/ProductDetail/GCT/USB4120-03-C?qs=KUoIvG%2F9IlZaAd13sVDhkQ%3D%3D
J3 J5 J6: "Connector", ComponentLink1Description=Datasheet
  J3: ComponentLink1URL=https://www.tme.com/Document/ceb306d6300f4d2860483975b79af125/XT60UPB-M.pdf
  J5 J6: ComponentLink1URL=https://www.tme.com/Document/aa7a0328674fda4109d00dc748bb5162/XT60UPB-F.pdf
J4: "Connector", Manufacturer_Name="JST (JAPAN SOLDERLESS TERMINALS)", Manufacturer_Part_Number=BM06B-GHS-TBT(LF)(SN), Mouser Part Number=306-BM06BGHSTBTLFSNN, Datasheet Link=https://datasheet.lcsc.com/szlcsc/2004111131_JST-Sales-America-BM06B-GHS-TBT-LF-SN_C495534.pdf, Height=4.05mm, Mouser Price/Stock=https://www.mouser.co.uk/ProductDetail/JST-Commercial/BM06B-GHS-TBTLFSN?qs=cdbOS8ANM9CObKjnhD04mw%3D%3D
J7 J8: "Connector", Manufacturer_Name=Amass, Datasheet Link=https://www.tme.eu/Document/81f11ca924696756331f21b972812074/XT30PB-F.pdf, Height=9.4mm, Manufacturer_Part_Number=XT30UPB-F
L1: library part 104CDMCCDS-220MC, "Bobine de 22 uH, 5 A", Manufacturer_Name=Sumida, ComponentLink1Description=Datasheet, ComponentLink1URL=https://products.sumida.com/products/pdf/104CDMCCDS.pdf, Copyright="Copyright (C) 2025 Ultra Librarian. All rights reserved.", Manufacturer_Part_Number=104CDMCCDS-220MC, Type="Fixed Inductors"
L2 L3: library part ECS-MPIL0530-4R7MC, "4.7 µH Shielded Molded Inductor 5 A 60mOhm Max Nonstandard -", Package="ECS-MPIL0530-0-2 ECS", Check_prices=https://www.snapeda.com/parts/ECS-MPIL0530-4R7MC/ECS/view-part/?ref=eda, MF="ECS Inc.", MP=ECS-MPIL0530-4R7MC, SnapEDA_Link=https://www.snapeda.com/parts/ECS-MPIL0530-4R7MC/ECS/view-part/?ref=snap
R1: library part CRCW080510K0FKEAHP, "Resistor", Manufacturer_Name=Vishay, Mouser Part Number=71-CRCW080510K0FKEAH, Arrow Part Number=CRCW080510K0FKEAHP, Arrow Price/Stock=https://www.arrow.com/en/products/crcw080510k0fkeahp/vishay?utm_currency=USD&region=europe, ClassName=PowerModul, Datasheet Link=https://componentsearchengine.com/Datasheets/1/CRCW08051R00FKEAHP.pdf, Height=0.6mm, Manufacturer_Part_Number=CRCW080510K0FKEAHP, Mouser Price/Stock=https://www.mouser.co.uk/ProductDetail/Vishay-Dale/CRCW080510K0FKEAHP?qs=FlFvgi4rxBybVOW6oiRQjA%3D%3D
R2: library part CRCW0805160KFKEAHP, "Resistor", Manufacturer_Name=Vishay, ClassName=PowerModul, Datasheet Link=https://componentsearchengine.com/Datasheets/1/CRCW08051R00FKEAHP.pdf, Height=0.6mm, Manufacturer_Part_Number=CRCW0805160KFKEAHP
R3: library part CRCW08054K70FKEAC, "Resistor", Manufacturer_Name=Vishay, Mouser Part Number=71-CRCW08054K70FKEAC, Arrow Part Number=CRCW08054K70FKEAC, Arrow Price/Stock=https://www.arrow.com/en/products/crcw08054k70fkeac/vishay?region=nac, ClassName=PowerModul, Datasheet Link=https://mouser.componentsearchengine.com/Datasheets/1/CRCW08054K70FKEAC.pdf, Height=0.6mm, Manufacturer_Part_Number=CRCW08054K70FKEAC, Mouser Price/Stock=https://www.mouser.co.uk/ProductDetail/Vishay-Dale/CRCW08054K70FKEAC?qs=E3Y5ESvWgWOQAAVugewEHA%3D%3D
R4: library part CRCW080530K0FKEAC, "Resistor", Manufacturer_Name=Vishay, Mouser Part Number=71-CRCW080530K0FKEAC, Arrow Part Number=CRCW080530K0FKEAC, Arrow Price/Stock=https://www.arrow.com/en/products/crcw080530k0fkeac/vishay?region=nac, ClassName=PowerModul, Datasheet Link=https://mouser.componentsearchengine.com/Datasheets/1/CRCW080530K0FKEAC.pdf, Height=0.6mm, Manufacturer_Part_Number=CRCW080530K0FKEAC, Mouser Price/Stock=https://www.mouser.co.uk/ProductDetail/Vishay-Dale/CRCW080530K0FKEAC?qs=E3Y5ESvWgWMYq9MgiyaMow%3D%3D
R5 R6: library part CRCW0805665KFKEA, "Resistor", Manufacturer_Name=Vishay, Datasheet Link=http://www.vishay.com/docs/20035/dcrcwe3.pdf, Height=0.5mm, Manufacturer_Part_Number=CRCW0805665KFKEA
R7 R8: library part CRCW080510K2FKEA, "Resistor", Manufacturer_Name=Vishay, Mouser Part Number=71-CRCW0805-10.2K-E3, Arrow Part Number=CRCW080510K2FKEA, Arrow Price/Stock=https://www.arrow.com/en/products/crcw080510k2fkea/vishay?region=nac, Datasheet Link=http://www.vishay.com/docs/20035/dcrcwe3.pdf, Height=0.5mm, Manufacturer_Part_Number=CRCW080510K2FKEA, Mouser Price/Stock=https://www.mouser.co.uk/ProductDetail/Vishay-Dale/CRCW080510K2FKEA?qs=LOX6nxTstibTXRK16X5NEQ%3D%3D
R9 R11: library part CRCW080537K4FKEA, "Resistor", Manufacturer_Name=Vishay, Mouser Part Number=71-CRCW0805-37.4K-E3, Datasheet Link=http://www.vishay.com/docs/20035/dcrcwe3.pdf, Height=0.5mm, Manufacturer_Part_Number=CRCW080537K4FKEA, Mouser Price/Stock=https://www.mouser.co.uk/ProductDetail/Vishay-Dale/CRCW080537K4FKEA?qs=ofC1ORbyWJfwcxfoRR0MKw%3D%3D
R10 R12: library part CRCW0805130KFKEA, "Resistor", Manufacturer_Name=Vishay, Mouser Part Number=71-CRCW0805-130K-E3, Arrow Part Number=CRCW0805130KFKEA, Arrow Price/Stock=https://www.arrow.com/en/products/crcw0805130kfkea/vishay, Datasheet Link=http://www.vishay.com/docs/20035/dcrcwe3.pdf, Height=0.5mm, Manufacturer_Part_Number=CRCW0805130KFKEA, Mouser Price/Stock=https://www.mouser.co.uk/ProductDetail/Vishay-Dale/CRCW0805130KFKEA?qs=0y7Riw94L4iHKWUxGOctIA%3D%3D
R13 R14: library part CRCW08051K96FKEA, "Resistor", Manufacturer_Name=Vishay, Mouser Part Number=71-CRCW08051K96FKEA, Arrow Part Number=CRCW08051K96FKEA, Arrow Price/Stock=https://www.arrow.com/en/products/crcw08051k96fkea/vishay?region=nac, Datasheet Link=http://www.vishay.com/docs/20035/dcrcwe3.pdf, Height=0.5mm, Manufacturer_Part_Number=CRCW08051K96FKEA, Mouser Price/Stock=https://www.mouser.co.uk/ProductDetail/Vishay-Dale/CRCW08051K96FKEA?qs=1CkV0QOCgMpA%2F6GTgXIN%2Fg%3D%3D
R15 R16 R17 R18 R24: library part CRCW080520K0FKEA, "Resistor", Manufacturer_Name=Vishay, Mouser Part Number=71-CRCW0805-20K-E3, Arrow Part Number=CRCW080520K0FKEA, Arrow Price/Stock=https://www.arrow.com/en/products/crcw080520k0fkea/vishay, Datasheet Link=http://www.vishay.com/docs/20035/dcrcwe3.pdf, Height=0.5mm, Manufacturer_Part_Number=CRCW080520K0FKEA, Mouser Price/Stock=https://www.mouser.co.uk/ProductDetail/Vishay-Dale/CRCW080520K0FKEA?qs=t6Mf8e9K%2Ful9pWSqXxFD1w%3D%3D
R19: library part CRCW08052K00FKEAC, "Resistor", Manufacturer_Name=Vishay, Mouser Part Number=71-CRCW08052K00FKEAC, Arrow Part Number=CRCW08052K00FKEAC, Arrow Price/Stock=https://www.arrow.com/en/products/crcw08052k00fkeac/vishay?utm_currency=USD&region=nac, Datasheet Link=http://www.vishay.com/docs/28773/crcwce3.pdf, Height=0.6mm, Manufacturer_Part_Number=CRCW08052K00FKEAC, Mouser Price/Stock=https://www.mouser.co.uk/ProductDetail/Vishay-Dale/CRCW08052K00FKEAC?qs=E3Y5ESvWgWP6floxGsbShA%3D%3D
R20: library part CRCW080518K0FKEAC, "Resistor", Manufacturer_Name=Vishay, Mouser Part Number=71-CRCW080518K0FKEAC, Arrow Part Number=CRCW080518K0FKEAC, Arrow Price/Stock=https://www.arrow.com/en/products/crcw080518k0fkeac/vishay?region=nac, Datasheet Link=https://www.arrow.com/en/products/crcw080518k0fkeac/vishay?region=nac, Height=0.5mm, Manufacturer_Part_Number=CRCW080518K0FKEAC, Mouser Price/Stock=https://www.mouser.co.uk/ProductDetail/Vishay-Dale/CRCW080518K0FKEAC?qs=E3Y5ESvWgWPSwNx6fNHotQ%3D%3D
R21: library part CRCW0805806RFKEAHP, "Resistor", Manufacturer_Name=Vishay, Datasheet Link=https://componentsearchengine.com/Datasheets/1/CRCW08051R00FKEAHP.pdf, Height=0.6mm, Manufacturer_Part_Number=CRCW0805806RFKEAHP
R22: library part CRCW0805750RFKEAHP, "Resistor", Manufacturer_Name=Vishay, Mouser Part Number=71-CRCW0805750RFKEAH, Arrow Part Number=CRCW0805750RFKEAHP, Arrow Price/Stock=https://www.arrow.com/en/products/crcw0805750rfkeahp/vishay?region=nac, Datasheet Link=https://componentsearchengine.com/Datasheets/1/CRCW08051R00FKEAHP.pdf, Height=0.6mm, Manufacturer_Part_Number=CRCW0805750RFKEAHP, Mouser Price/Stock=https://www.mouser.co.uk/ProductDetail/Vishay-Dale/CRCW0805750RFKEAHP?qs=40TFAHZMFvdp5ouInDDfaw%3D%3D
R23: library part CRCW08052K49FKEAC, "Resistor", Manufacturer_Name=Vishay, Mouser Part Number=71-CRCW08052K49FKEAC, Arrow Part Number=CRCW08052K49FKEAC, Arrow Price/Stock=https://www.arrow.com/en/products/crcw08052k49fkeac/vishay, Datasheet Link=https://componentsearchengine.com/Datasheets/1/CRCW08052K49FKEAC.pdf, Height=0.5mm, Manufacturer_Part_Number=CRCW08052K49FKEAC, Mouser Price/Stock=https://www.mouser.com/Search/Refine.aspx?Keyword=71-CRCW08052K49FKEAC
R25 R27: library part CRCW0805100RFKEA, "Resistor", Manufacturer_Name=Vishay, Mouser Part Number=71-CRCW0805-100-E3, Arrow Part Number=CRCW0805100RFKEA, Arrow Price/Stock=https://www.arrow.com/en/products/crcw0805100rfkea/vishay?utm_currency=USD&region=nac, Datasheet Link=http://www.vishay.com/docs/20035/dcrcwe3.pdf, Height=0.5mm, Manufacturer_Part_Number=CRCW0805100RFKEA, Mouser Price/Stock=https://www.mouser.co.uk/ProductDetail/Vishay-Dale/CRCW0805100RFKEA?qs=LOX6nxTstiYDPDKmuLyNLw%3D%3D
R26: library part CRCW08051K60FKEAC, "Resistor", Manufacturer_Name=Vishay, Mouser Part Number=71-CRCW08051K60FKEAC, Arrow Part Number=CRCW08051K60FKEAC, Arrow Price/Stock=https://www.arrow.com/en/products/crcw08051k60fkeac/vishay, Datasheet Link=https://www.arrow.com/en/products/crcw08051k60fkeac/vishay, Height=0.6mm, Manufacturer_Part_Number=CRCW08051K60FKEAC, Mouser Price/Stock=https://www.mouser.co.uk/ProductDetail/Vishay-Dale/CRCW08051K60FKEAC?qs=E3Y5ESvWgWMJaZYHQus8LQ%3D%3D
U1: "Buck converter", Manufacturer_Name="ROHM Semiconductor", Mouser Part Number=755-BD9G401EFJ-ME2, ClassName=PowerModul, Datasheet Link=https://componentsearchengine.com/Datasheets/1/BD9G401EFJ-ME2.pdf, Height=1mm, Manufacturer_Part_Number=BD9G401EFJ-ME2, Mouser Price/Stock=https://www.mouser.co.uk/ProductDetail/ROHM-Semiconductor/BD9G401EFJ-ME2?qs=HXFqYaX1Q2yXryPBxafgDg%3D%3D
U2 U3: "Power Supply", Manufacturer_Name="Texas Instruments", Mouser Part Number=595-TPS54531DDAR, Arrow Part Number=TPS54531DDAR, Arrow Price/Stock=https://www.arrow.com/en/products/tps54531ddar/texas-instruments?utm_currency=USD&region=nac, Datasheet Link=http://www.ti.com/lit/gpn/tps54531, Height=1.7mm, Manufacturer_Part_Number=TPS54531DDAR, Mouser Price/Stock=https://www.mouser.co.uk/ProductDetail/Texas-Instruments/TPS54531DDAR?qs=jA5Ki6243onykODzUePbag%3D%3D
U4: library part ACS770KCB-150U-PFF-T, "150 A , Unidirectional", ComponentLink1Description=Datasheet, ComponentLink1URL=https://www.allegromicro.com/~/media/Files/Datasheets/ACS770-Datasheet.ashx
U5: "Integrated Circuit", Manufacturer_Name=onsemi, Mouser Part Number=863-LM321SN3T1G, Arrow Part Number=LM321SN3T1G, Arrow Price/Stock=https://www.arrow.com/en/products/lm321sn3t1g/on-semiconductor?utm_currency=USD&region=nac, Datasheet Link=https://www.onsemi.com/pub/Collateral/LM321-D.PDF, Height=1.1mm, Manufacturer_Part_Number=LM321SN3T1G, Mouser Price/Stock=https://www.mouser.co.uk/ProductDetail/onsemi/LM321SN3T1G?qs=slMPpRTKD5qNVsCzBsHVZA%3D%3D

## Free pads (board coordinates)
  oval 2x1.524 hole 2 unplated: 1(92,152) 1(92,208) 1(148,152) 1(148,208)

## Via types
v1: diameter 1, hole 0.5, Top Layer to Bottom Layer, 1 vias
v2: diameter 1.27, hole 0.711, Top Layer to Bottom Layer, 1 vias

## Nets (pads, with @x,y where several pads share a name; then routed paths per layer and width w, separated by ;. In a path a pad name is that pad's centre, name@x,y a point inside that pad or via, vN(x,y) a via of type N, cw(c..) or ccw(c..) an arc to the next point about the centre after c; other vN are vias at no path point)
"+5V PIXHAWK": C2.2 C3.2 C4.2 C27.2 J4.1 J4.2 L1.2 R2.2 R20.2 R22.2 U4.1 U5.5 | length 25
  Top Layer w0.254: R2.2 C4.2 111.261,154.949 C3.2 113.293,154.94 C2.2 C27.2 117.221,155.19 117.597,155.566 U4.1 118.728,158.359 125.125,158.359 127.766,155.718 R20.2 130.586,155.718 U5.5
"+22.2V BATTERY": C1.2 C5.2 C6.2 C7.2 C15.2 C16.2 C17.2 C20.2 C21.2 C22.2 J5.P J6.P J7.1 J8.1 R1.2 R5.2 R6.2 R24.1 U1.7 U1.8 U2.2 U3.2 U4.5
GND: C2.1 C3.1 C4.1 C5.1 C6.1 C7.1 C10.1 C11.1 C13.1 C14.1 C15.1 C16.1 C17.1 C19.1 C20.1 C21.1 C22.1 C24.1 C25.1 C26.1 C27.1 CS1.2 D1.2 D2.2 D3.2 D5.1 D8.3 J1.1 J1.2 J1.3 J1.4 J1.5 J1.6 J2.A1 J2.A12 J2.B1 J2.B12 J2.MH1 J2.MH2 J2.MH3 J2.MH4 J2.MH6 J3.N J4.5 J4.6 J5.N J6.N J7.2 J8.2 R3.1 R4.1 R9.1 R10.1 R11.1 R12.1 R13.1 R14.1 R16.1 R19.1 R23.1 R26.1 U1.2 U1.5 U1.9 U2.7 U3.7 U4.2 U5.2 | length 72.7
  Top Layer w0.254: C4.1 111.261,153.289 C3.1 113.293,153.28 C2.1 115.566,153.28 116.192,152.654 R16.1 ; U4.2 119.507,155.816 118.881,155.19 C27.1 118.881,154.69 118.126,153.935 R16.1 ; R19.1 130.958,159.634 131.699,160.375 C24.1 131.766,167.14 R11.1 134.714,166.792 135.154,166.792 R14.1@136.62,165.326 ; U5.2 131.399,153.009 131.399,152.495 130.452,151.548 119.493,151.548 118.985,152.056 118.474,152.056 118.126,152.404 R16.1 ; C26.1 131.944,184.244 R12.1 134.255,186.555 C22.1 140.954,186.555 C21.1 C20.1 C20.1@143.101,186.539 ; U3.7@136.62,175.236 R14.1@136.62,165.326 ; C13.1 C14.1 138.307,161.529 136.62,163.216 R14.1 R14.1@136.62,165.326 ; J2.MH4 J2.MH4@143.845,164.224 ; J2.MH1@147.588,163.993 J2.MH1 ; J2.MH2@147.588,169.255 J2.MH2
NetC1_1: C1.1 D1.1 L1.1 U1.1
NetC8_1: C8.1 R3.2
NetC8_2: C8.2 U1.3
NetC9_1: C9.1 U2.1
NetC9_2: C9.2 D2.1 L2.1 U2.8
NetC10_2: C10.2 C11.2 J1.7 J1.8 J1.9 J1.10 L2.2 R7.2
NetC12_1: C12.1 U3.1
NetC12_2: C12.2 D3.1 L3.1 U3.8 | length 12.1
  Top Layer w0.254: D3.1@144.355,175.189 D3.1
  Top Layer w1: U3.8 139.168,175.236 ; C12.2 139.827,175.895 139.168,175.236 ; D3.1@144.355,175.189 141.873,172.707 L3.1 139.954,174.45 139.168,175.236
NetC13_2: C13.2 C14.2 J2.A4 J2.A9 J2.B4 J2.B9 L3.2 R8.2 | length 16.4
  Top Layer w0.254: R8.2 134.87,161.012 136.013,159.869 C14.2 C13.2 141.093,159.869 141.959,160.735 141.959,166.252 141.587,166.624 ; L3.2 L3.2@140.304,167.907
  Top Layer w2: L3.2@140.304,167.907 141.587,166.624
  other v1: 145.669,168.529
NetC18_1: C18.1 R9.2
NetC18_2: C18.2 C19.2 U2.6
NetC23_1: C23.1 R11.2
NetC23_2: C23.2 C24.2 U3.6
NetC25_2: C25.2 U2.4
NetC26_2: C26.2 U3.4
NetCS1_1: CS1.1 D4.2 D5.2 J3.P
NetD4_1: D4.1 U4.4
NetD6_1: D6.1 J4.3 R25.2
NetD6_2: D6.2 D7.2 D8.2 R21.2 R22.1
NetD7_1: D7.1 J4.4 R27.2
NetD8_1: D8.1 R21.1 R23.2
NetR1_1: R1.1 U1.6
NetR2_1: R2.1 R4.2 U1.4 | length 12.5
  Top Layer w0.254: R4.2 97.348,160.126 102.534,154.94 R2.1
NetR5_1: R5.1 R10.2 U2.3
NetR6_1: R6.1 R12.2 U3.3
NetR7_1: R7.1 R13.2 U2.5
NetR8_1: R8.1 R14.2 U3.5 | length 2.1
  Top Layer w0.254: R8.1 R14.2
NetR15_1: R15.1 R16.2 U5.1 | length 10.7
  Top Layer w0.254: R16.2 122.051,152.654 122.559,153.162 R15.1 130.602,153.162 U5.1
NetR15_2: R15.2 U4.3 | length 2.8
  Top Layer w0.254: U4.3 122.217,156.428 122.217,155.51 122.565,155.162 R15.2
NetR17_1: R17.1 R19.2 R20.1 | length 7.1
  Top Layer w0.254: R20.1 128.032,157.734 R19.2 R17.1
NetR17_2: R17.2 R18.2 U5.3 | length 8.1
  Top Layer w0.254: U5.3 135.148,153.182 R18.2 135.505,153.289 135.853,153.637 135.853,153.887 137.128,155.162 R17.2
NetR18_1: R18.1 R25.1 U5.4 | length 12.3
  Top Layer w0.254: U5.4 132.542,155.702 133.477,155.702 133.89,155.289 R18.1 135.255,156.145 135.608,156.498 135.631,156.498 136.063,156.93 136.063,158.408 136.495,158.84 137.959,158.84 138.811,157.988 v2(138.811,155.321)
NetR24_2: R24.2 R26.2 R27.1
pads on no net: D6.3 D7.3 J1.MP1 J1.MP2 J2.A5 J2.A6 J2.A7 J2.A8 J2.B5 J2.B6 J2.B7 J2.B8 J2.MH5 J4.MP1 J4.MP2 U4.NC

## Polygon pours and split planes (outlines as drawn)
no net on Int1 (GND) (split plane): 149.49,150.51 90.51,150.51 90.51,209.49 149.49,209.49
no net on Int2 (PWR) (split plane): 149.49,150.51 90.51,150.51 90.51,209.49 149.49,209.49

## Other copper
Multi-Layer:
  lines w0.254: 89.746,150 149.746,150 ; 90,150 90,210 150,210

## Text inside footprints (layer, text, board x,y; h text height)
L1: Bottom Overlay "RefDes" at 98.339,157.099 h1.27 r180; Bottom Overlay "REFDES" at 98.021,157.099 h1.27 r180; Mechanical 13 "RefDes2" at 98.021,157.099 h1.27 r180